# Altium PCB nerf.PcbDoc
Units mil, origin at the board's own origin, x right, y up, seen from the top; angles counter-clockwise.
Board outline 1750 x 1000 mil, 2 copper layers (Top Layer, Bottom Layer), stack 62.8 mil thick; 17 components, 20 nets, 76 pads, 5 vias.
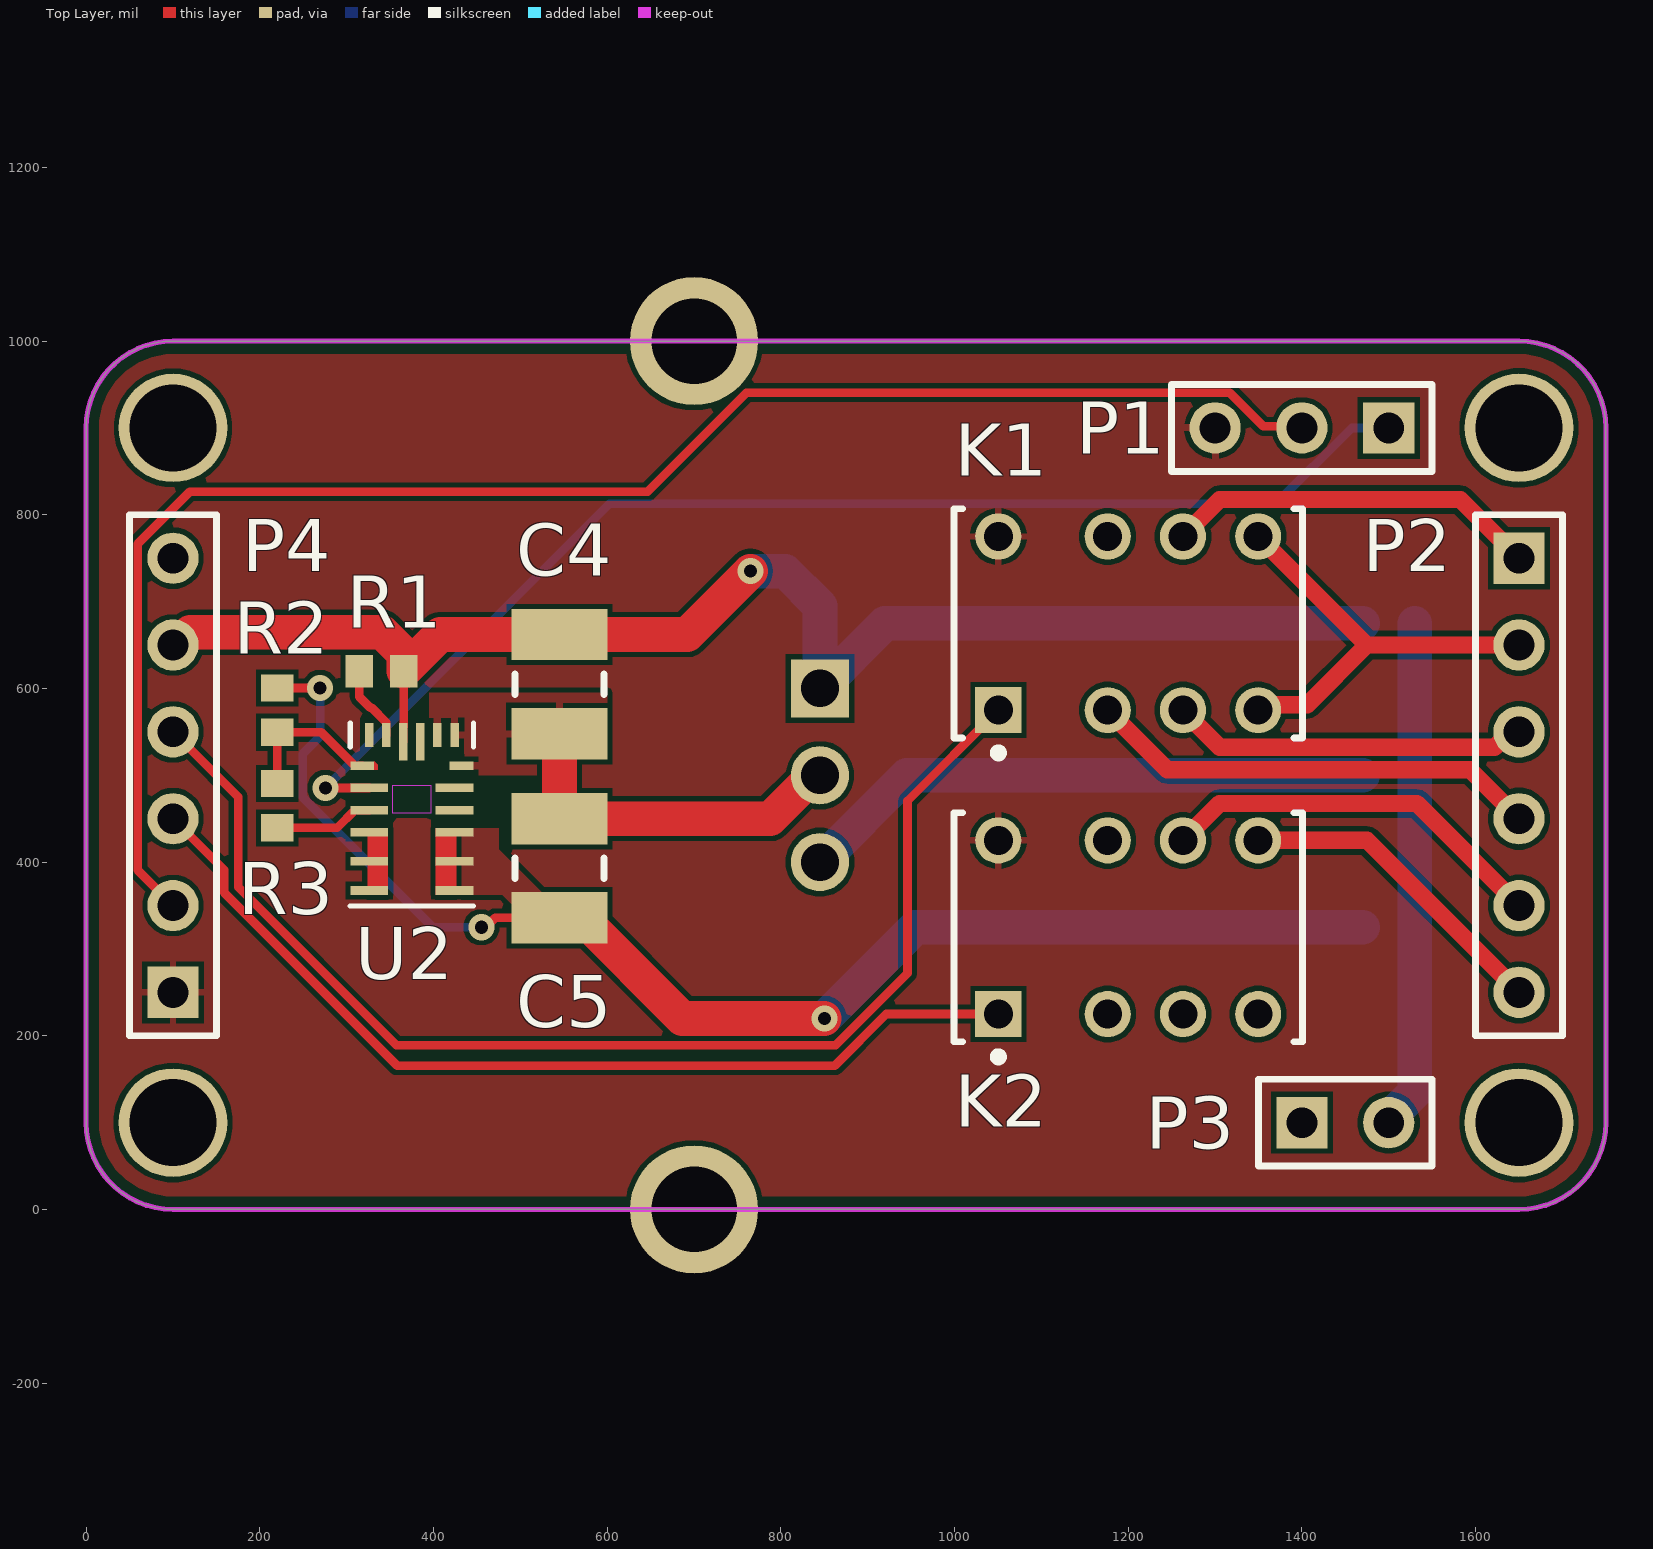
[diagram p0: Top Layer view]
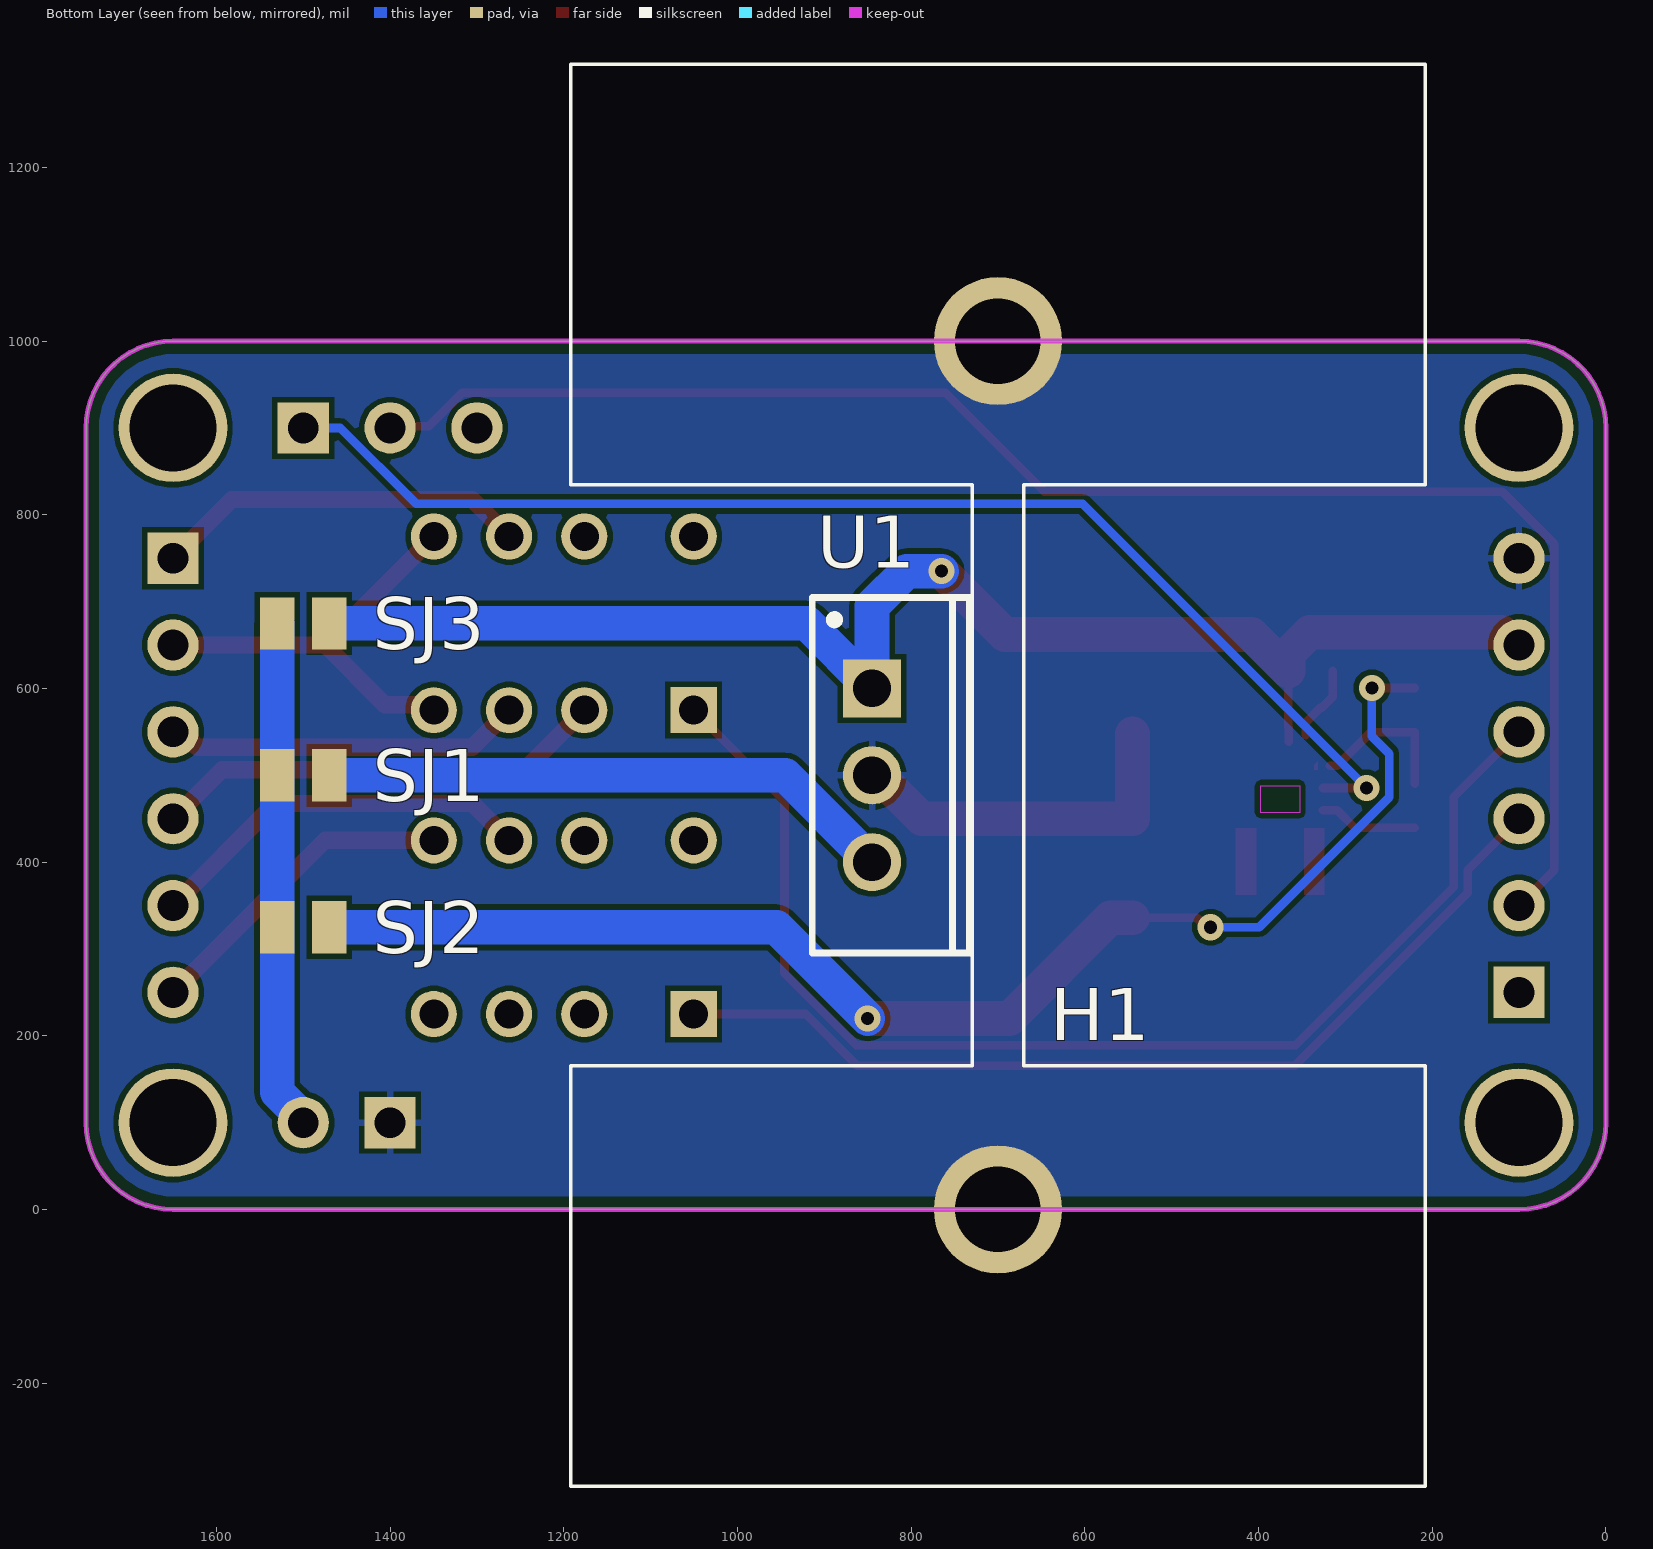
[diagram p1: Bottom Layer view, seen from below]

## Layer stack, top to bottom
Top Solder: solder mask 1, Solder Resist, Dk 3.5
Top Layer: signal copper 1.4
Dielectric 1: dielectric 60, FR-4, Dk 4.5
Bottom Layer: signal copper 1.4
Bottom Solder: solder mask 1, Solder Resist, Dk 3.5

## Board outline
1650,0 ccw(c1650,100) 1750,100 1750,900 ccw(c1650,900) 1650,1000 100,1000 ccw(c100,900) 0,900 0,100 ccw(c100,100) 100,0

## Design rules (kind name [scope] priority, off if disabled: settings)
BoardOutlineClearance [All] p1: gap=15 ignorepadtopadclearanceinfootprint=FALSE
Clearance OSHPARK [All] p1: gap=6 ignorepadtopadclearanceinfootprint=FALSE
Clearance [All] p2: gap=6 ignorepadtopadclearanceinfootprint=FALSE except(0: Arc-Hole Track-Hole SMDPad-Hole THPad-Hole Via-Hole Fill-Hole Poly-Hole Region-Hole Text-Hole)
ComponentClearance [All] p1: gap=1 collisioncheckmode=3 verticalgap=1 showdistances=FALSE
DiffPairsRouting [All] p1: maxlimit=393.7 minlimit=6 mostfreqgap=8 toplayer_minwidth=6 toplayer_maxwidth=15 toplayer_prefwidth=8 bottomlayer_minwidth=6 bottomlayer_maxwidth=15 bottomlayer_prefwidth=8 maxuncoupledlength=500
HoleSize [All] p1: absolutevalues=TRUE maxlimit=250 minlimit=10 maxpercent=80.000 minpercent=20.000
HoleToHoleClearance [All] p1: gap=10 allowstackedmicrovias=FALSE
MinimumAnnularRing [All] p1: minimumring=5
MinimumSolderMaskSliver [All] p1: minsoldermaskwidth=0
PlaneClearance [All] p1: clearance=10
PlaneConnect [All] p1: planeconnectstyle=Direct reliefexpansion=16 reliefentries=4 reliefconductorwidth=6 reliefairgap=6
PolygonConnect POWER [(InNet('VBUCK') OR InNet('MVIN'))] p1: connectstyle=Direct reliefconductorwidth=10 reliefentries=4 polygonreliefangle="90 Angle" airgapwidth=10
PolygonConnect NGND_H1 [InNet('NGND') vs HasFootprint('FAT22051E')] p2: connectstyle=Direct reliefconductorwidth=10 reliefentries=4 polygonreliefangle="90 Angle" airgapwidth=10
PolygonConnect [All] p3: connectstyle=Relief reliefconductorwidth=8 reliefentries=4 polygonreliefangle="90 Angle" airgapwidth=6
RoomDefinition nerf [InComponentClass('nerf')] p1: confinementstyle=ConfineIn formatcopy=TRUE lockcomponents=FALSE outline 0,0 1750,0 1750,1000 0,1000
RoutingCorners [All] p1: cornerstyle=45-Degree minsetback=49.21 maxsetback=49.21
RoutingVias [All] p1: holewidth=15 width=30 viastyle="Through Hole" minholewidth=13 minwidth=27 maxholewidth=100 maxwidth=114
SilkToSilkClearance [All] p1: silktosilkclearance=0
SilkToSolderMaskClearance [IsPad] p1: minsilkscreentomaskgap=6 clearancetoexposedcopper=TRUE
SolderMaskExpansion [All] p1: expansion=2.95 istentingtop=FALSE
Width [All] p1: maxlimit=40 minlimit=6 preferedwidth=10
20 further rules are at their usual default settings.

## Components (designator, comment, footprint, x,y, rotation, side; value= is the part's Value field where it differs from the comment)
C4 "10uF_1210" CAPC3325X28N 545,605 r90 top
C5 "22uF_1210" CAPC3325X28N 545,392.91 r90 top
H1 "FA-T220-51E" FAT22051E 700,0 r90 bottom locked
K1 "G6K-2P-Y-DC3" FP-G6K-2P-Y_DC3-MFG 1200,675 r0 top
K2 "G6K-2P-Y-DC3" FP-G6K-2P-Y_DC3-MFG 1200,325 r0 top
P1 "Header 3" HDR1X3 1500,900 r180 top
P2 "Header 6" HDR1X6 1650,750 r270 top
P3 "Header 2" HDR1X2 1400,100 r0 top
P4 "Header 6" HDR1X6 100,250 r90 top
R1 "100k_0603" RESC1608X05N 340,620 r180 top
R2 "100k_0603" RESC1608X05N 220,575 r270 top
R3 "19.1k_0603" RESC1608X05N 220,465 r270 top
SJ1 "Solder Jumper" SJ-Footprint 1500,500 r0 bottom
SJ2 "Solder Jumper" SJ-Footprint 1500,325 r0 bottom
SJ3 "Solder Jumper" SJ-Footprint 1500,675 r0 bottom
U1 "L7806CV" TO220 845,500 r270 bottom
U2 "MPM3610AGQV-Z" MPM3610AGQV-Z-Footprint-1 375,450 r0 top

## Footprints (in the part's own frame and the unit in brackets; to place one, negate y for a bottom-side part, rotate by r counter-clockwise, add the part's x,y. Pads: shape width x height; smd on the part's side, far side on the other; paste and mask are expansions set on the pad)
CAPC3325X28N [mm] "Chip Capacitor, 2-Leads, Body 3.30x2.50mm, IPC Medium Density"
  rect 1.5x2.8 smd: 1(-1.45,0) 2(1.45,0)
  silkscreen extent -0.3,-1.3 0.3,1.3, body extent -1.85,-1.4 1.85,1.4, height 2.79
FAT22051E [mm]
  round 3.75 hole 2.5: 1(0,0) 2(25.4,0)
  silkscreen extent -8.1,-12.5 33.5,12.5, body extent -8.1,-12.5 33.5,12.5, height 50.9
FP-G6K-2P-Y_DC3-MFG [mm]
  rect 1.35x1.35 hole 0.85 paste-1000 mask+0: 1(-3.8,-2.54)
  round 1.35 hole 0.85 paste-1000 mask+0: 2(-0.6,-2.54) 3(1.6,-2.54) 4(3.8,-2.54) 5(3.8,2.54) 6(1.6,2.54) 7(-0.6,2.54) 8(-3.8,2.54)
  silkscreen extent -5.1,-3.91 5.1,3.35, body extent -5.2,-3.45 5.2,3.45, height 0.25
HDR1X2 [mm] "Connector; Header; 2 Position"
  rect 1.5x1.5 hole 0.9: 1(0,0)
  round 1.5 hole 0.9: 2(2.54,0)
  silkscreen extent -1.27,-1.27 3.81,1.27
HDR1X3 [mm] "Connector; Header; 3 Position"
  rect 1.5x1.5 hole 0.9: 1(0,0)
  round 1.5 hole 0.9: 2(2.54,0) 3(5.08,0)
  silkscreen extent -1.27,-1.27 6.35,1.27
HDR1X6 [mm] "Connector; Header; 6 Position"
  rect 1.5x1.5 hole 0.9: 1(0,0)
  round 1.5 hole 0.9: 2(2.54,0) 3(5.08,0) 4(7.62,0) 5(10.16,0) 6(12.7,0)
  silkscreen extent -1.27,-1.27 13.97,1.27
MPM3610AGQV-Z-Footprint-1 [mm]
  rect 0.7x0.25 smd: 1(-1.45,1.55) 12(1.45,1.55)
  rect 1.1x0.25 smd: 2(-1.25,0.9) 3(-1.25,0.25) 4(-1.25,-0.4) 5(-1.25,-1.25) 6(-1.25,-2.1) 7(1.25,-2.1) 8(1.25,-1.25) 9(1.25,-0.4) 10(1.25,0.25) 11(1.25,0.9)
  rect 0.25x0.7 smd: 13(1.25,2.45) 14(0.75,2.45) 17(-0.75,2.45) 18(-1.25,2.45)
  rect 0.25x1.1 smd: 15(0.25,2.25) 16(-0.25,2.25)
  Top Layer region: -1.3,-2.225 -0.7,-2.225 -0.7,-0.275 -1.3,-0.275
  Top Layer region: 0.7,-2.225 1.3,-2.225 1.3,-0.275 0.7,-0.275
  Top Layer region: -1.1,1.425 -1.1,1.675 -1,1.575 -1,1.425
  Keep-Out Layer region: -0.575,0.18 0.575,0.18 0.575,0.97 -0.575,0.97
  silkscreen extent -1.8,-2.55 1.8,2.8, body extent -1.5,-2.5 1.5,2.5, height 1.6
RESC1608X05N [mm] "Chip Resistor, 2-Leads, Body 1.58x0.85mm, IPC Medium Density"
  rect 0.8x0.95 smd: 1(-0.65,0) 2(0.65,0)
  body extent -0.83,-0.48 0.82,0.48, height 0.5
SJ-Footprint [mil]
  rect 40x60 smd: 1(-30,0) 2(30,0)
TO220 [mm] "TO, Thru-Hole, Vertical, Heatsink Mounted; 3 In-Line Leads; Pitch 2.54 mm"
  rect 1.7x1.7 hole 1.1: 1(-2.54,0)
  round 1.7 hole 1.1: 2(0,0) 3(2.54,0)
  silkscreen extent -5.2,-1.75 5.2,2.85, body extent -5.25,-1.8 5.25,2.9, height 19.7

## Part data
C4: library part CMP-001-00003-1, "1210 Standard 10uF Ceramic Multilayer Cap", Capacitance=10uF, Case/Package=1210, Dielectric=X7R, Tolerance=10%, Voltage Rating=25V, Lead Free="Lead Free", RoHS Compliant=Yes
C5: library part CMP-001-00002-1, "1210 Standard 22uF Ceramic Multilayer Cap", Capacitance=22uF, Case/Package=1210, Dielectric=X7R, Tolerance=10%, Voltage Rating=25V, Lead Free="Lead Free", RoHS Compliant=Yes
H1: "Hardware", Manufacturer_Name=Ohmite, Datasheet Link=https://componentsearchengine.com/Datasheets/1/FA-T220-51E.pdf, Height=50.8mm, Manufacturer_Part_Number=FA-T220-51E
K1 K2: library part CMP-00011-1, "Relay; E-Mech; Low Signal; DPDT; Cur-Rtg 0.3/1AAC/ADC; Ctrl-V 3DC; Vol-Rtg 125/30AC/DC", Case/Package=DIP, Coil Current=33mA, Coil Power=100mW, Coil Resistance=91R, Coil Voltage (DC)=3V, Contact Current Rating=1A, Max Operating Temperature=70°C, Max Voltage Rating (AC)=125V, Max Voltage Rating (DC)=60V, Min Operating Temperature=-40°C, Package Quantity=50, Approvals=UL,CSA, Coil Type=Non-Latching, Contact Material=Gold,Silver, Current Rating=1A, Depth=6.5mm, Height=5mm, Length=10mm, Life (Hours)=100000Hour, Max Current Rating=1A, Mount="PCB,Through Hole", Number of Pins=8, Operate Time=3ms, Packaging=Rail/Tube, Power Consumption=100mW, Relay Type=Telecom, Release Time=3ms, Series=G6K, Termination="PC Pin", Throw Configuration=DPDT, Voltage Rating (AC)=125V, Weight=0.7g
P1: "Header, 3-Pin", LatestRevisionDate=17-Jul-2002, LatestRevisionNote="Re-released for DXP Platform.", Publisher="Altium Limited"
P2 P4: "Header, 6-Pin", LatestRevisionDate=17-Jul-2002, LatestRevisionNote="Re-released for DXP Platform.", Publisher="Altium Limited"
P3: "Header, 2-Pin", LatestRevisionDate=17-Jul-2002, LatestRevisionNote="Re-released for DXP Platform.", Publisher="Altium Limited"
R1 R2: library part CMP-009-00004-1, "Res Thick Film 0603 100K Ohm", Case/Package=0603, Power Rating=100mW, Resistance=100kR, Tolerance=1%, Lead Free="Lead Free", RoHS Compliant=Yes
R3: library part CMP-009-00005-1, "19.1K Ohm", Case/Package=0603, Power Rating=100mW, Resistance=19.1kR, Tolerance=1%, Lead Free="Lead Free", RoHS Compliant=Yes
SJ1 SJ2 SJ3: library part CMP-00013-3, "NO Solder Jumper"
U1: library part CMP-00016-1, "L7806 Series 1.5 A 6 V Three Terminal Voltage Regulator - TO-220", Case/Package=TO, Dropout Voltage=2V, Max Input Voltage=35V, Max Operating Temperature=125°C, Max Output Current=1.5A, Min Input Voltage=8V, Min Operating Temperature=0°C, Min Output Voltage=6V, Package Quantity=50, Power Supply Rejection Ratio (PSRR)=59dB, Quiescent Current=8mA, Tolerance=5%, Contact Plating=Tin,Matte, Height=9.15mm, Lead Free="Lead Free", Length=10.4mm, Mount="Through Hole", Nominal Output Voltage=6V, Number of Outputs=1, Number of Pins=3, Number of Regulators=1, Output Configuration=Positive, Output Current=1.5A, Output Type=Fixed, Output Voltage=6V, Packaging=Rail/Tube, Polarity=Positive, Radiation Hardening=No, REACH SVHC="No SVHC", Series=-, Weight=0.08113oz, Width=4.6mm
U2: library part CMP-00012-8, "MPM3610A Series 21 V 1.2 A Adj. SMT Synchronous Step-Down Converter - QFN-20", Case/Package=QFN, Max Input Voltage=21V, Max Operating Temperature=125°C, Max Output Current=600mA, Min Input Voltage=4.5V, Min Operating Temperature=-40°C, Features=UVLO,OCP,OTP, Height=0.06inch, Lead Free="Lead Free", Length=0.2inch, Mount="Surface Mount", Number of Outputs=1, Packaging="Tape and Reel", RoHS Compliant=Yes, Series=-, Voltage - Output 1=21V, Width=0.12inch

## Free pads (board coordinates)
  round 125 hole 100: P$1(100,100) P$1(100,900) P$1(1650,100) P$1(1650,900)

## Via types
v1: diameter 30, hole 15, Top Layer to Bottom Layer, 5 vias

## Nets (pads, with @x,y where several pads share a name; then routed paths per layer and width w, separated by ;. In a path a pad name is that pad's centre, name@x,y a point inside that pad or via, vN(x,y) a via of type N, cw(c..) or ccw(c..) an arc to the next point about the centre after c; other vN are vias at no path point)
AGND: R3.2 U2.3 | length 114.3
  Top Layer w10: R3.2 288.78,439.41 309.21,459.84 U2.3
B: K1.2 P2.4 | length 525.4
  Top Layer w20: K1.2 1244.95,506.43 1593.57,506.43 P2.4
DART: P1.2 P4.2 | length 1862.9
  Top Layer w10: P4.2 59.47,390.53 59.47,766.79 119.19,826.5 646.45,826.5 760.48,940.53 1316.79,940.53 1355.47,901.84 1398.16,901.84 P1.2
GND: K1.8 K2.8 P1.3 P4.1
MVIN: C4.2 P4.5 R1.1 SJ3.1 U1.1 U2.16 | length 1678.2
  Top Layer w10: U2.16 365.16,555.16 365.59,555.59 R1.1
  Top Layer w40: P4.5 105.16,650 119.86,664.7 340.93,664.7 365.59,640.04 R1.1 407.68,662.09 C4.2 692.09,662.09 v1(765,735)
  Bottom Layer w40: v1(765,735) 805,735 845,695 U1.1 920,675 SJ3.1
NetR1_2: R1.2 U2.17 | length 87.3
  Top Layer w10: R1.2 314.41,590.59 327.31,577.69 328.81,577.69 345.39,561.11 345.39,546.54 U2.17
NetR2_2: R2.2 R3.1 U2.1 | length 172.6
  Top Layer w10: R3.1 R2.2 270.83,549.41 309.21,511.02 U2.1
NetU2_4: U2.4 U2.5 U2.6
NGND: C4.1 C5.2 H1.1 H1.2 P3.1 P4.6 U1.2 U2.12 U2.13 U2.14 | length 418.6
  Top Layer w40: C4.1 C5.2 787.71,450 837.71,500 U1.2
O: K1.4 K1.5 P2.2 | length 508.2
  Top Layer w20: K1.4 1355.95,581.34 1405.95,581.34 1474.61,650 ; K1.5 1474.61,650 ; P2.2 1474.61,650
R: K1.3 P2.3 | length 411.9
  Top Layer w20: K1.3 1305.57,532.43 1621.86,532.43 1639.43,550 P2.3
S+: K2.6 P2.5 | length 453.3
  Top Layer w20: K2.6 1305.57,467.57 1532.43,467.57 P2.5
S-: K2.5 P2.6 | length 372.9
  Top Layer w20: K2.5 1475,425 P2.6
SPOOL: K2.1 P4.3 | length 1108.2
  Top Layer w10: P4.3 159,391 159,364.7 358.11,165.59 862.06,165.59 921.47,225 K2.1
TRIG: K1.1 P4.4 | length 1436.8
  Top Layer w10: P4.4 175,475 175,371.33 357.33,189 862.84,189 945.83,271.99 945.83,470.44 K1.1
VBUCK: C5.1 R2.1 SJ2.1 U2.7 U2.8 U2.9 | length 1562.1
  Top Layer w10: R2.1 v1(269.41,600.59) ; v1(455,325) 460.41,325 471.24,335.83 C5.1
  Top Layer w40: C5.1 570.59,335.83 686.42,220 v1(850,220)
  Bottom Layer w10: v1(269.41,600.59) 269.41,544.91 249.43,524.93 249.43,474.66 399.1,325 v1(455,325)
  Bottom Layer w40: v1(850,220) 955,325 SJ2.1
VCC: P1.1 U2.2 | length 1446.6
  Top Layer w10: v1(275.43,485.43) U2.2
  Bottom Layer w10: v1(275.43,485.43) 602.57,812.57 1369.89,812.57 1457.31,900 P1.1
VLDO: SJ1.1 U1.3 | length 666.4
  Bottom Layer w40: U1.3 945,500 SJ1.1
VNERF: P3.2 SJ1.2 SJ2.2 SJ3.2 | length 587.4
  Bottom Layer w40: P3.2 1500,105.16 1530,135.16 SJ2.2 SJ1.2 SJ3.2
Y: K1.6 P2.1 | length 432.6
  Top Layer w20: K1.6 1305.57,817.57 1582.43,817.57 P2.1
pads on no net: K1.7 K2.2 K2.3 K2.4 K2.7 U2.10 U2.11 U2.15 U2.18

## Polygon pours and split planes (outlines as drawn)
GND on Top Layer "GND_L01_P003" (solid, pour order 3): 0,0 1750,0 1750,1000 0,1000
NGND on Top Layer "NGND_L01_P002" (solid, pour order 2): 600,500 600,585 600,595 395,595 395,500
VBUCK on Top Layer "VBUCK_L01_P000" (solid, pour order 0): 402.56,439.17 475,439.17 475,415 525,365 600,365 600,315 526.73,315 479.33,362.4 402.56,362.4
NGND on Bottom Layer "NGND_L02_P001" (solid, pour order 1): 0,0 1750,0 1750,1000 0,1000

## Keep-outs
Keep-Out Layer:
  the board outline again, w5.91